# Altium PCB BUSBAR.PcbDoc
Units mm, origin at the board's own origin, x right, y up, seen from the top; angles counter-clockwise.
Board outline 100 x 110 mm, 2 copper layers (Top Layer, Bottom Layer); 79 components, 27 nets, 320 pads, 0 vias.
Unrouted connection lines stored in the file: 183.
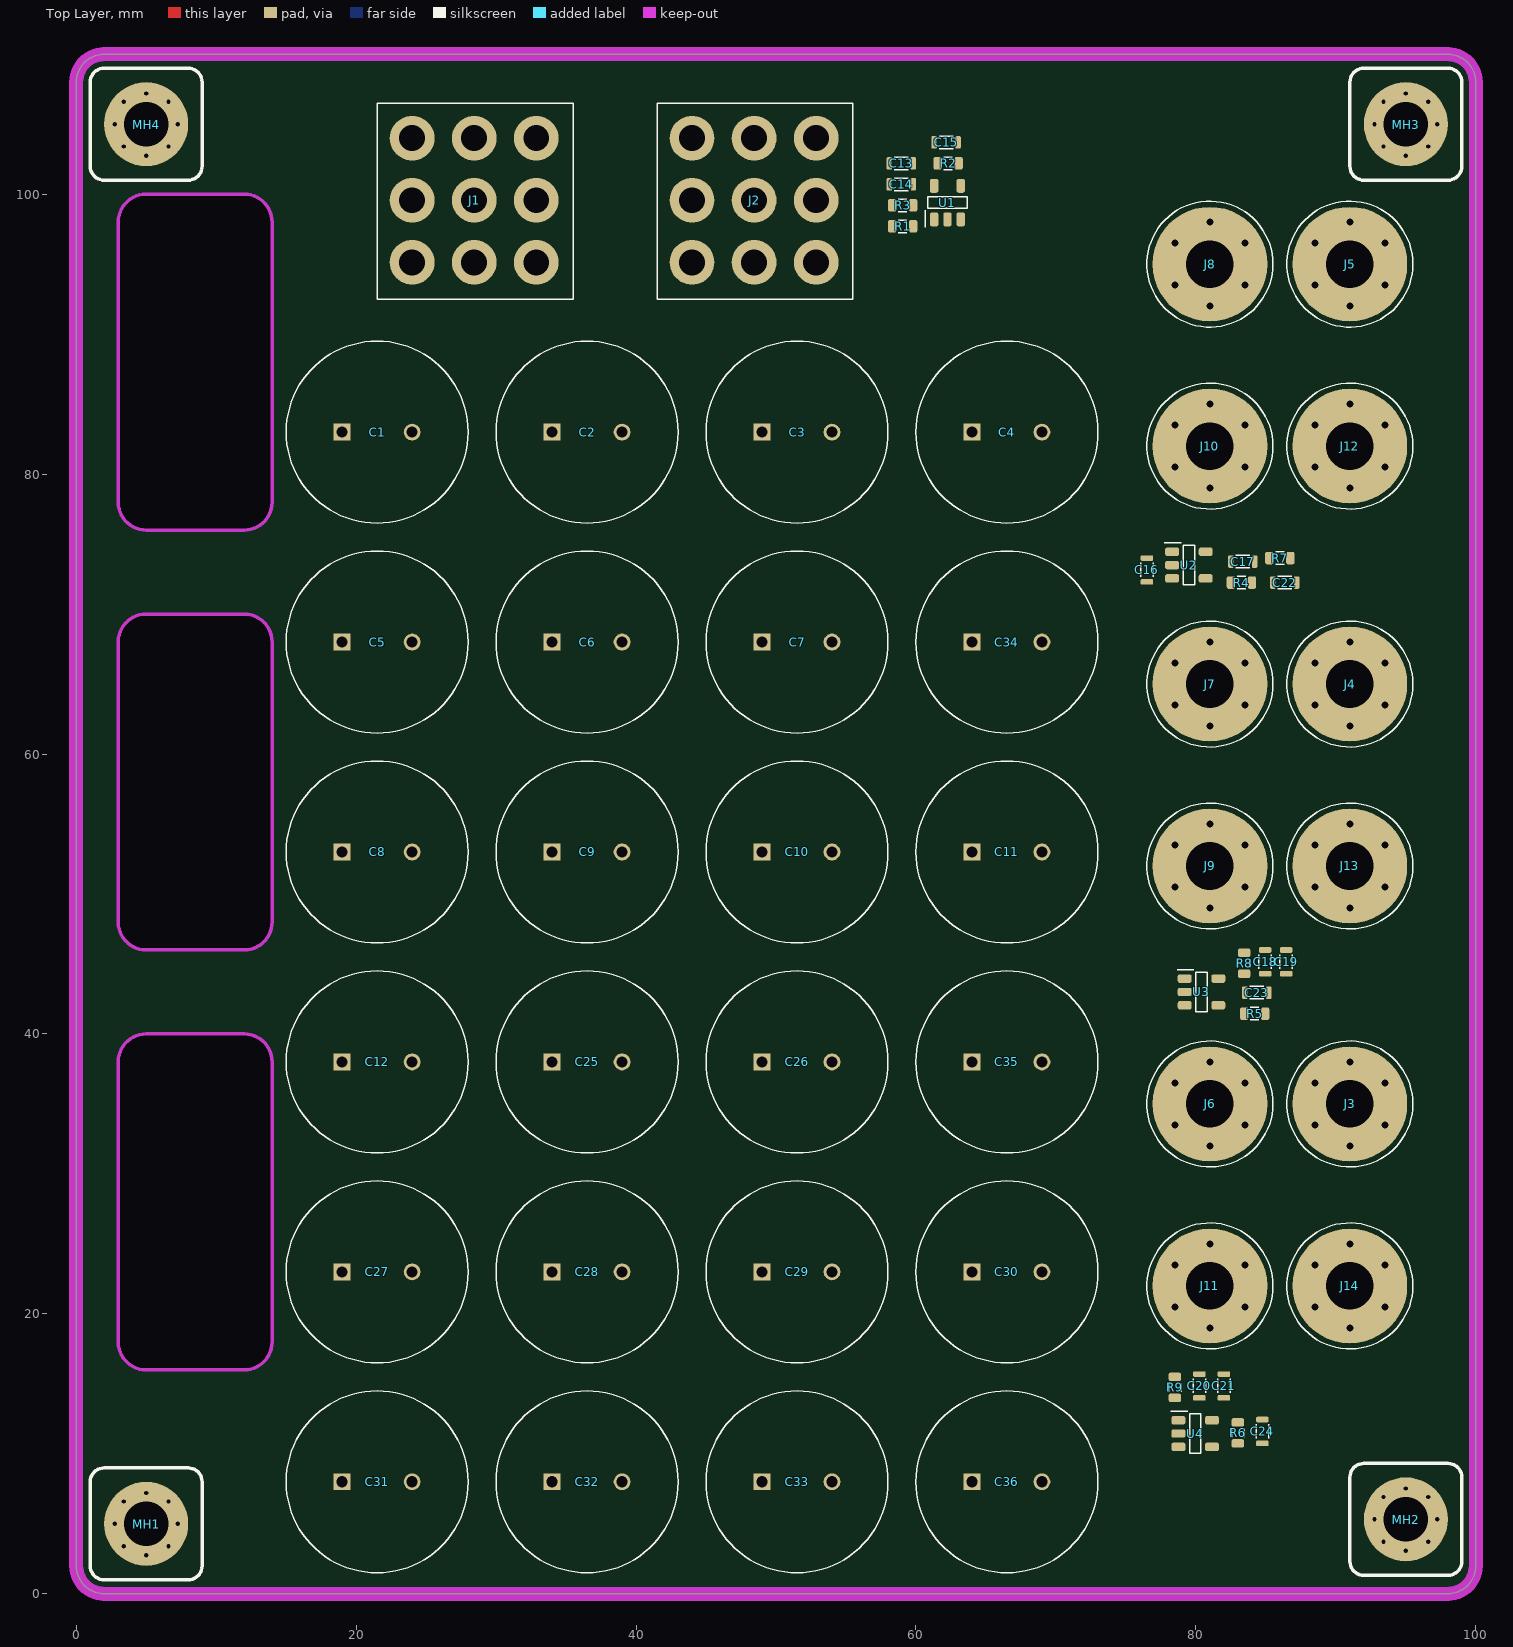
[diagram p0: Top Layer view]
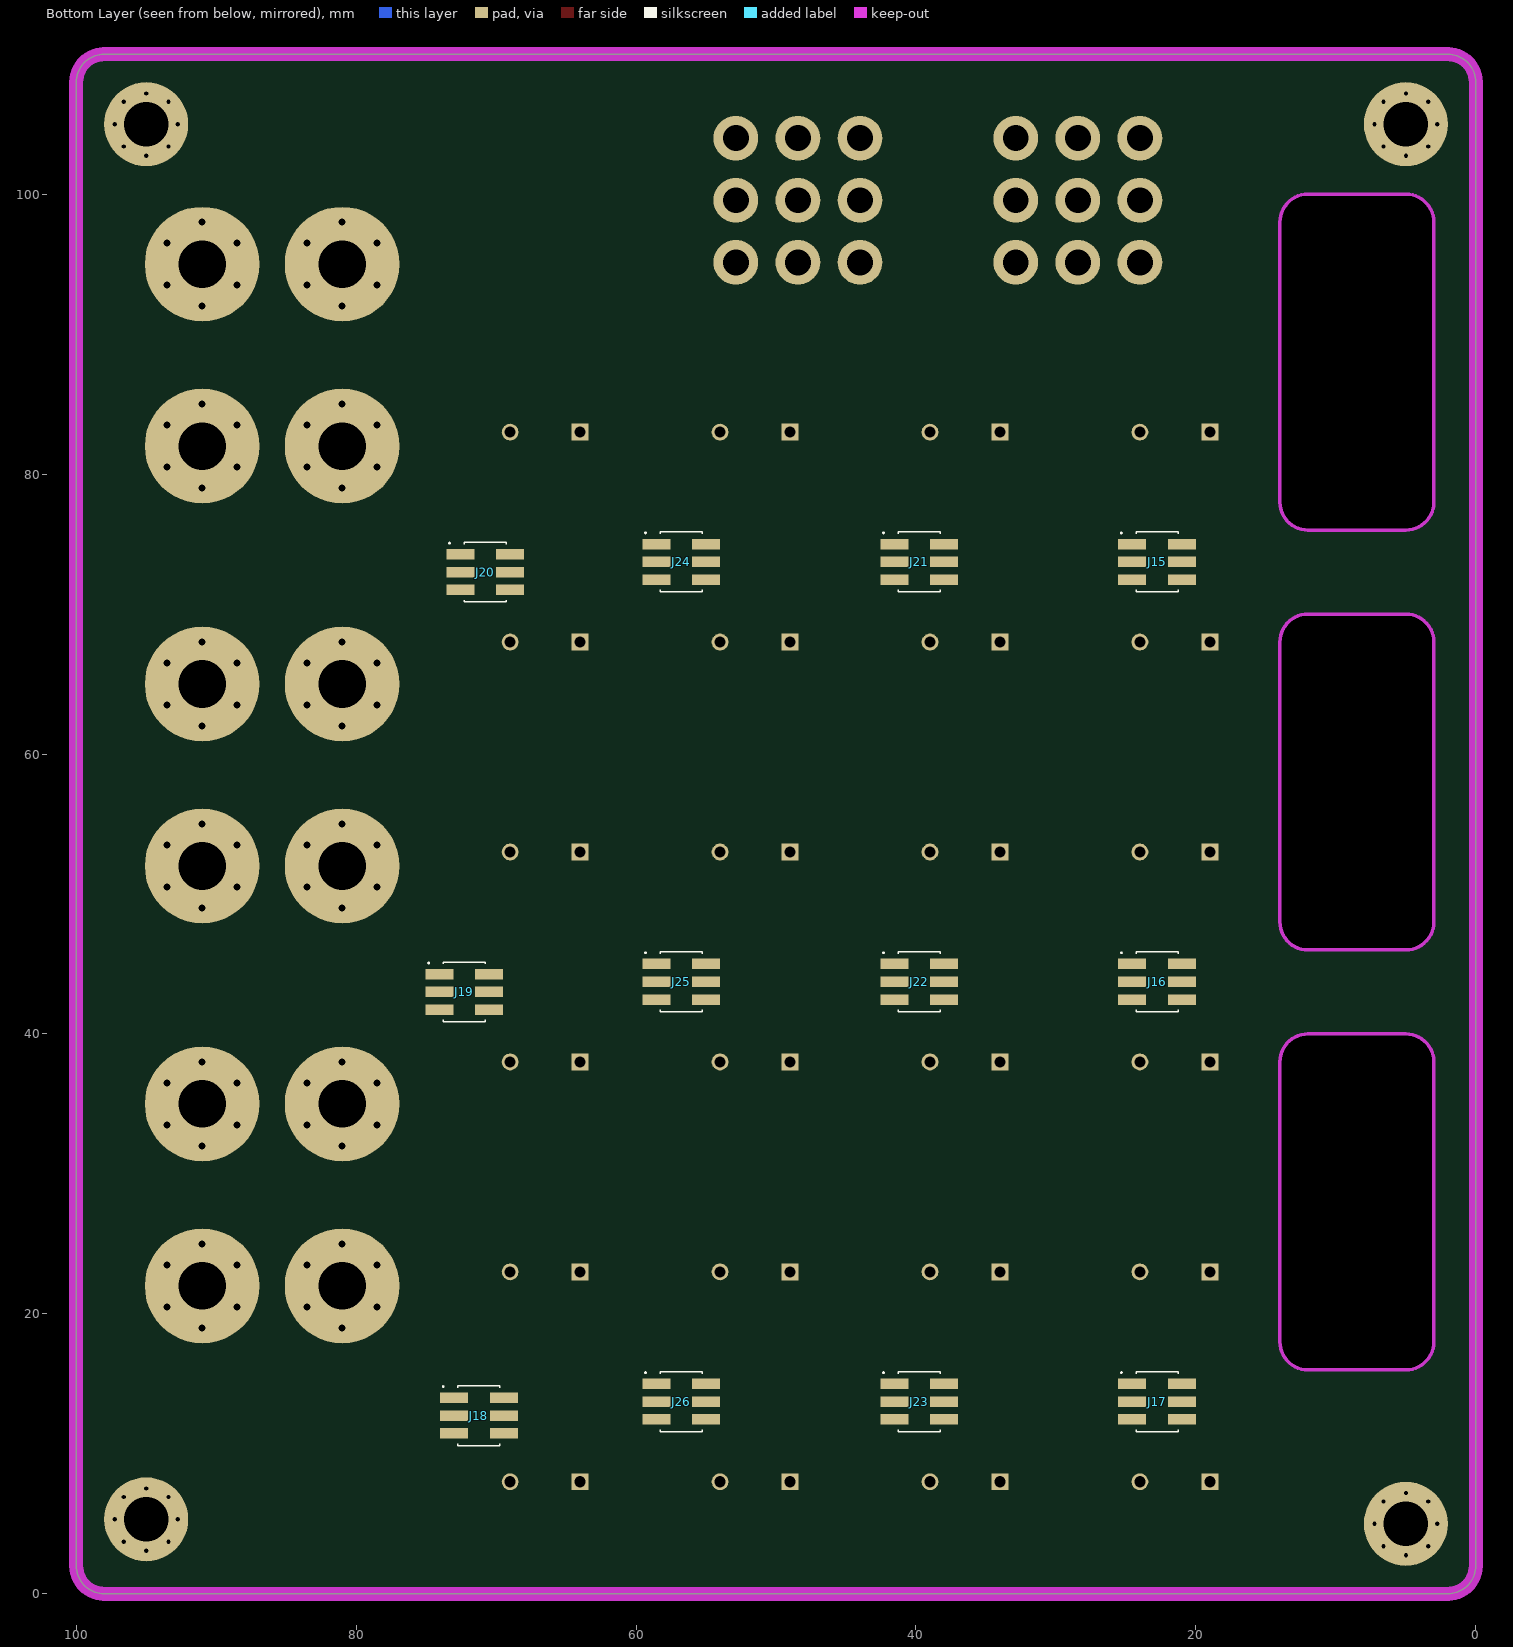
[diagram p1: Bottom Layer view, seen from below]

## Layer stack, top to bottom
Top Solder: solder mask 0.0102, Solder Resist, Dk 3.5
Top Layer: signal copper 0.0356
Dielectric 1: dielectric 0.32, FR-4, Dk 4.8
Bottom Layer: signal copper 0.0356
Bottom Solder: solder mask 0.0102, Solder Resist, Dk 3.5

## Board outline
0,2 0,108 cw(c2,108) 2,110 98,110 cw(c98,108) 100,108 100,2 cw(c98,2) 98,0 2,0 cw(c2,2)
cut-out: 3,78 3,98 cw(c5,98) 5,100 12,100 cw(c12,98) 14,98 14,78 cw(c12,78) 12,76 5,76 cw(c5,78)
cut-out: 5,46 cw(c5,48) 3,48 3,68 cw(c5,68) 5,70 12,70 cw(c12,68) 14,68 14,48 cw(c12,48) 12,46
cut-out: 5,16 cw(c5,18) 3,18 3,38 cw(c5,38) 5,40 12,40 cw(c12,38) 14,38 14,18 cw(c12,18) 12,16

## Design rules (kind name [scope] priority, off if disabled: settings)
Clearance [All] p1: gap=0.254 ignorepadtopadclearanceinfootprint=FALSE
Height [All] p1: minheight=0 maxheight=50 prefheight=12.7
HoleSize [All] p1: absolutevalues=TRUE maxlimit=5 minlimit=0.025 maxpercent=80.000 minpercent=20.000
PolygonConnect [All] p1: connectstyle=Relief reliefconductorwidth=0.254 reliefentries=4 polygonreliefangle="90 Angle" airgapwidth=0.254
RoutingVias [All] p1: holewidth=0.3 width=0.6 viastyle="Through Hole" minholewidth=0.15 minwidth=0.5 maxholewidth=5 maxwidth=6
SolderMaskExpansion [All] p1: expansion=0.102 istentingtop=FALSE
SupplyNets "Schematic Supply Nets_2" [InNet('+3V3')] p1: voltage=0.000
SupplyNets "Schematic Supply Nets_1" [InNet('VIN')] p2: voltage=0.000
SupplyNets "Schematic Supply Nets" [InNet('GND')] p3: voltage=0.000
Width [All] p1: maxlimit=0.254 minlimit=0.254 preferedwidth=0.254
28 further rules are at their usual default settings.

## Components (designator, comment, footprint, x,y, rotation, side; value= is the part's Value field where it differs from the comment)
C1 "ESK107M160AL4AA" C_THT_13X25X5 19,83 r0 top value=100u
C2 "ESK107M160AL4AA" C_THT_13X25X5 34,83 r0 top value=100u
C3 "ESK107M160AL4AA" C_THT_13X25X5 49,83 r0 top value=100u
C4 "ESK107M160AL4AA" C_THT_13X25X5 64,83 r0 top value=100u
C5 "ESK107M160AL4AA" C_THT_13X25X5 19,68 r0 top value=100u
C6 "ESK107M160AL4AA" C_THT_13X25X5 34,68 r0 top value=100u
C7 "ESK107M160AL4AA" C_THT_13X25X5 49,68 r0 top value=100u
C8 "ESK107M160AL4AA" C_THT_13X25X5 19,53 r0 top value=100u
C9 "ESK107M160AL4AA" C_THT_13X25X5 34,53 r0 top value=100u
C10 "ESK107M160AL4AA" C_THT_13X25X5 49,53 r0 top value=100u
C11 "ESK107M160AL4AA" C_THT_13X25X5 64,53 r0 top value=100u
C12 "ESK107M160AL4AA" C_THT_13X25X5 19,38 r0 top value=100u
C13 "0603" C_0603 59.8,102.2 r180 top value=1u
C14 "0603" C_0603 59.8,100.7 r180 top value=0.1u
C15 "0603" C_0603 61.3,103.7 r0 top value=Value
C16 "0603" C_0603 76.5,72.3 r90 top value=1u
C17 "0603" C_0603 82.5,73.75 r0 top value=0.1u
C18 "0603" C_0603 84.95,44.3 r90 top value=1u
C19 "0603" C_0603 86.45,44.3 r90 top value=0.1u
C20 "0603" C_0603 80.25,14 r90 top value=1u
C21 "0603" C_0603 82,14 r90 top value=0.1u
C22 "0603" C_0603 85.5,72.25 r0 top value=Value
C23 "0603" C_0603 83.5,42.95 r0 top value=Value
C24 "0603" C_0603 84.75,12.45 r270 top value=Value
C25 "ESK107M160AL4AA" C_THT_13X25X5 34,38 r0 top value=100u
C26 "ESK107M160AL4AA" C_THT_13X25X5 49,38 r0 top value=100u
C27 "ESK107M160AL4AA" C_THT_13X25X5 19,23 r0 top value=100u
C28 "ESK107M160AL4AA" C_THT_13X25X5 34,23 r0 top value=100u
C29 "ESK107M160AL4AA" C_THT_13X25X5 49,23 r0 top value=100u
C30 "ESK107M160AL4AA" C_THT_13X25X5 64,23 r0 top value=100u
C31 "ESK107M160AL4AA" C_THT_13X25X5 19,8 r0 top value=100u
C32 "ESK107M160AL4AA" C_THT_13X25X5 34,8 r0 top value=100u
C33 "ESK107M160AL4AA" C_THT_13X25X5 49,8 r0 top value=100u
C34 "ESK107M160AL4AA" C_THT_13X25X5 64,68 r0 top value=100u (schematic designator C7)
C35 "ESK107M160AL4AA" C_THT_13X25X5 64,38 r0 top value=100u (schematic designator C26)
C36 "ESK107M160AL4AA" C_THT_13X25X5 64,8 r0 top value=100u (schematic designator C33)
J1 "74651195R" 74651195R 24,104 r270 top
J2 "74651195R" 74651195R 44,104 r270 top
J3 "7466103" PAD_D8.2_H3.4 91,35 r0 top
J4 "7466103" PAD_D8.2_H3.4 91,65 r0 top
J5 "7466103" PAD_D8.2_H3.4 91,95 r0 top
J6 "7466103" PAD_D8.2_H3.4 81,35 r0 top
J7 "7466103" PAD_D8.2_H3.4 81,65 r0 top
J8 "7466103" PAD_D8.2_H3.4 81,95 r0 top
J9 "7466103" PAD_D8.2_H3.4 81,52 r0 top
J10 "7466103" PAD_D8.2_H3.4 81,82 r0 top
J11 "7466103" PAD_D8.2_H3.4 81,22 r0 top
J12 "7466103" PAD_D8.2_H3.4 91,82 r0 top
J13 "7466103" PAD_D8.2_H3.4 91,52 r0 top
J14 "7466103" PAD_D8.2_H3.4 91,22 r0 top
J15 "HEADER" HEADER_FEMALE_SMD_2X3_1.27MM 24.55,75 r180 bottom
J16 "HEADER" HEADER_FEMALE_SMD_2X3_1.27MM 24.55,45 r180 bottom
J17 "HEADER" HEADER_FEMALE_SMD_2X3_1.27MM 24.55,15 r180 bottom
J18 "HEADER" HEADER_FEMALE_SMD_2X3_1.27MM 73,14 r180 bottom
J19 "HEADER" HEADER_FEMALE_SMD_2X3_1.27MM 74.05,44.27 r180 bottom
J20 "HEADER" HEADER_FEMALE_SMD_2X3_1.27MM 72.55,74.27 r180 bottom
J21 "HEADER" HEADER_FEMALE_SMD_2X3_1.27MM 41.55,75 r180 bottom
J22 "HEADER" HEADER_FEMALE_SMD_2X3_1.27MM 41.55,45 r180 bottom
J23 "HEADER" HEADER_FEMALE_SMD_2X3_1.27MM 41.55,15 r180 bottom
J24 "HEADER" HEADER_FEMALE_SMD_2X3_1.27MM 58.55,75 r180 bottom
J25 "HEADER" HEADER_FEMALE_SMD_2X3_1.27MM 58.55,45 r180 bottom
J26 "HEADER" HEADER_FEMALE_SMD_2X3_1.27MM 58.55,15 r180 bottom
MH1 "M3" MOUNTING_HOLE_M3 5,5 r0 top
MH2 "M3" MOUNTING_HOLE_M3 95,5.321 r0 top
MH3 "M3" MOUNTING_HOLE_M3 95,105 r0 top
MH4 "M3" MOUNTING_HOLE_M3 5,105 r0 top
R1 "0603" R_0603 59.8,97.7 r180 top value=100K
R2 "0603" R_0603 63.05,102.2 r180 top value=Value
R3 "0603" R_0603 58.3,99.2 r0 top value=3K3
R4 "0603" R_0603 82.5,72.25 r0 top value=Value
R5 "0603" R_0603 84.95,41.45 r180 top value=Value
R6 "0603" R_0603 83,10.75 r90 top value=Value
R7 "0603" R_0603 85.25,74 r0 top value=10K
R8 "0603" R_0603 83.45,45.8 r270 top value=10K
R9 "0603" R_0603 78.5,15.5 r270 top value=10K
U1 "LM321LVIDBVR" SOT23-5 62.25,99.4 r90 top
U2 "LM321LVIDBVR" SOT23-5 79.5,73.5 r0 top
U3 "LM321LVIDBVR" SOT23-5 80.4,43 r0 top
U4 "LM321LVIDBVR" SOT23-5 79.95,11.45 r0 top

## Footprints (in the part's own frame and the unit in brackets; to place one, negate y for a bottom-side part, rotate by r counter-clockwise, add the part's x,y. Pads: shape width x height; smd on the part's side, far side on the other; paste and mask are expansions set on the pad)
74651195R [mm] "Terminals M5-13mm 85A"
  round 3.2 hole 1.85: 1(0,0) 2(4.435,0) 3(8.87,0) 4(0,4.435) 5(4.435,4.435) 6(8.87,4.435) 7(0,8.87) 8(4.435,8.87) 9(8.87,8.87)
  silkscreen extent -2.5,-2.5 11.5,11.5, body extent -0.57,-0.58 9.44,9.42, height 10
C_0603 [mm]
  rrect50% 0.4x0.9 smd: 1(0,0) 2(1.7,0)
  silkscreen extent 0.35,-0.45 1.35,0.45, body extent 0.05,-0.4 1.65,0.4, height 0.9
C_THT_13X25X5 [mm]
  rect 1.2x1.2 hole 0.8: 1(0,0)
  round 1.2 hole 0.8: 2(5,0)
  silkscreen extent -4,-6.5 9,6.5, body extent -4.23,-6.75 9.23,6.75, height 27.01
HEADER_FEMALE_SMD_2X3_1.27MM [mm]
  rect 2x0.75 smd: 1(0,0) 2(3.55,0) 3(0,-1.27) 4(3.55,-1.27) 5(0,-2.54) 6(3.55,-2.54)
  silkscreen extent -0.83,-3.4 3.27,0.86, body extent -0.48,-3.4 4.03,0.86, height 4.5
MOUNTING_HOLE_M3 [mm]
  round 0.6 hole 0.3: 1(-2.25,0) 1(-1.6,-1.6) 1(-1.6,1.6) 1(0,-2.25) 1(0,2.2) 1(1.6,-1.6) 1(1.6,1.6) 1(2.25,0)
  round 6 hole 3.2: 1(0,0)
  silkscreen extent -4,-4 4,4
PAD_D8.2_H3.4 [mm]
  round 1 hole 0.5: 1(-2.5,-1.5) 1(-2.5,1.5) 1(0,-3) 1(0,3) 1(2.5,-1.5) 1(2.5,1.5)
  round 8.2 hole 3.4: 1(0,0)
  silkscreen extent -4.5,-4.5 4.5,4.5
R_0603 [mm]
  rrect50% 0.6x0.9 smd: 1(0,0) 2(1.5,0)
  silkscreen extent 0.45,-0.45 1.05,0.45, body extent -0.05,-0.4 1.55,0.4, height 0.55
SOT23-5 [mm] "SOT23, 5-Leads"
  rrect50% 1x0.6 smd: 1(-1.2,0.95) 2(-1.2,0) 3(-1.2,-0.95) 4(1.2,-0.95) 5(1.2,0.95)
  silkscreen extent -1.75,-1.4 0.4,1.6, body extent -1.3,-1.5 1.3,1.5, height 1.1

## Part data
C1 C2 C3 C4 C5 C6 C7 C8 C9 C10 C11 C12 C25 C26 C27 C28 C29 C30 C31 C32 C33 C34 C35 C36: library part CAP_POL_THT_100u_160V, "Capacitor Polarised", Voltage=160V, ComponentLink1Description="New link", ComponentLink1URL=https://www.mouser.com.tr/ProductDetail/KEMET/ESK107M160AL4AA?qs=gt1LBUVyoHn74e7F9%2F5Ihw%3D%3D
C13 C14 C16 C17 C18 C19 C20 C21: library part CAP_0603, "SMD Chip Capacitor - 0603", Voltage=25V, ComponentLink1Description=Link
C15 C22 C23 C24: library part CAP_0603, "SMD Chip Capacitor - 0603", Voltage=Voltage, ComponentLink1Description=Link
J1 J2: library part TERMINAL_74651195R, "Terminals M5-13mm 85A", ComponentLink1Description="New link", ComponentLink1URL=https://www.mouser.com.tr/ProductDetail/Wurth-Elektronik/74651195R?qs=lBTPRtX1sU%252BvmxiYHcgAuw%3D%3D
J3 J4 J5 J6 J7 J8 J9 J10 J11 J12 J13 J14: library part TERMINAL_7466203, "Terminals, SMT, M3 Thread, 50A", Current=50A, ComponentLink1Description="New link", ComponentLink1URL=https://www.mouser.com.tr/ProductDetail/Wurth-Elektronik/7466203?qs=IfoubJuuTRb774UUJ30heA%3D%3D
J15 J16 J17 J18 J19 J20 J21 J22 J23 J24 J25 J26: library part HEADER_SMD_2X3_1.27MM
MH1 MH2 MH3 MH4: library part Mounting_Hole_M3, "M3 Mounting Hole"
R1 R3 R7 R8 R9: library part RES_0603, "SMD Chip Resistor - 0603", Tolerance=%1, ComponentLink1Description=Link
R2 R4 R5 R6: library part RES_0603, "SMD Chip Resistor - 0603", Tolerance=?, ComponentLink1Description=Link
U1 U2 U3 U4: library part OPAMP_LM321LVIDBVR, "Operational Amplifiers, Single 5.5-V, 1-MHz, 3-mV Offset Voltage", ComponentLink1Description="New link", ComponentLink1URL=https://www.mouser.com.tr/ProductDetail/Texas-Instruments/LM321LVIDBVR?qs=qSfuJ%252Bfl%2Fd66sZ569ResAQ%3D%3D

## Nets (pads, with @x,y where several pads share a name; then routed paths per layer and width w, separated by ;. In a path a pad name is that pad's centre, name@x,y a point inside that pad or via, vN(x,y) a via of type N, cw(c..) or ccw(c..) an arc to the next point about the centre after c; other vN are vias at no path point)
+3V3: C13.1 C14.1 C16.1 C17.1 C18.1 C19.1 C20.1 C21.1 J21.1 J22.1 J23.1 J24.1 J25.1 J26.1 U1.5 U2.5 U3.5 U4.5
BAT_VOLTAGE: C15.1 R2.2
GHA: J19.1
GHB: J18.1
GHC: J20.1
GLA: J19.3
GLB: J18.3
GLC: J20.3
GND: C1.2 C2.2 C3.2 C4.2 C5.2 C6.2 C7.2 C8.2 C9.2 C10.2 C11.2 C12.2 C13.2 C14.2 C15.2 C16.2 C17.2 C18.2 C19.2 C20.2 C21.2 C22.2 C23.2 C24.2 C25.2 C26.2 C27.2 C28.2 C29.2 C30.2 C31.2 C32.2 C33.2 J2.1 J2.2 J2.3 J2.4 J2.5 J2.6 J2.7 J2.8 J2.9 J9.1 J10.1 J11.1 J12.1 J13.1 J14.1 J15.2 J15.4 J15.6 J16.2 J16.4 J16.6 J17.2 J17.4 J17.6 J18.2 J18.4 J18.5 J18.6 J19.2 J19.4 J19.5 J19.6 J20.2 J20.4 J20.5 J20.6 J21.2 J21.4 J21.5 J21.6 J22.2 J22.4 J22.5 J22.6 J23.2 J23.4 J23.5 J23.6 J24.3 J24.5 J25.3 J25.5 J26.3 J26.5 MH1.1 MH2.1 MH3.1 MH4.1 R3.1 R7.1 R8.1 R9.1 U1.2 U2.2 U3.2 U4.2
I_PHASE_A: J24.2 J24.4 J24.6
I_PHASE_B: J25.2 J25.4 J25.6
I_PHASE_C: J26.2 J26.4 J26.6
NetR1_1: R1.1 R3.2 U1.1
NetR2_1: R2.1 U1.3 U1.4
NetR4_1: R4.1 U2.3 U2.4
NetR5_1: R5.1 U3.3 U3.4
NetR6_1: R6.1 U4.3 U4.4
NTC1-: J21.3 R7.2 U2.1
NTC2-: J22.3 R8.2 U3.1
NTC3-: J23.3 R9.2 U4.1
NTC_1_OUT: C22.1 R4.2
NTC_2_OUT: C23.1 R5.2
NTC_3_OUT: C24.1 R6.2
VIN: C1.1 C2.1 C3.1 C4.1 C5.1 C6.1 C7.1 C8.1 C9.1 C10.1 C11.1 C12.1 C25.1 C26.1 C27.1 C28.1 C29.1 C30.1 C31.1 C32.1 C33.1 J1.1 J1.2 J1.3 J1.4 J1.5 J1.6 J1.7 J1.8 J1.9 J3.1 J4.1 J5.1 J6.1 J7.1 J8.1 R1.2
VS_A: J15.1 J15.3 J15.5
VS_B: J16.1 J16.3 J16.5
VS_C: J17.1 J17.3 J17.5
pads on no net: C34.1 C34.2 C35.1 C35.2 C36.1 C36.2

## Keep-outs
Keep-Out Layer:
  lines w0.25: 3,18 ccw(c5,18) 5,16 12,16 ccw(c12,18) 14,18 14,38 ccw(c12,38) 12,40 5,40 ccw(c5,38) 3,38 3,18 ; 3,48 ccw(c5,48) 5,46 12,46 ccw(c12,48) 14,48 14,68 ccw(c12,68) 12,70 5,70 ccw(c5,68) 3,68 3,48 ; 3,78 ccw(c5,78) 5,76 12,76 ccw(c12,78) 14,78 14,98 ccw(c12,98) 12,100 5,100 ccw(c5,98) 3,98 3,78
  lines w1: 0,2 ccw(c2,2) 2,0 98.001,0 ccw(c98.001,2) 100.001,2 100.001,108.001 ccw(c98.001,108.001) 98.001,110.001 2,110.001 ccw(c2,108.001) 0,108.001 0,2